# EAGLE board 00A-094-A (EAGLE 9.6.2)
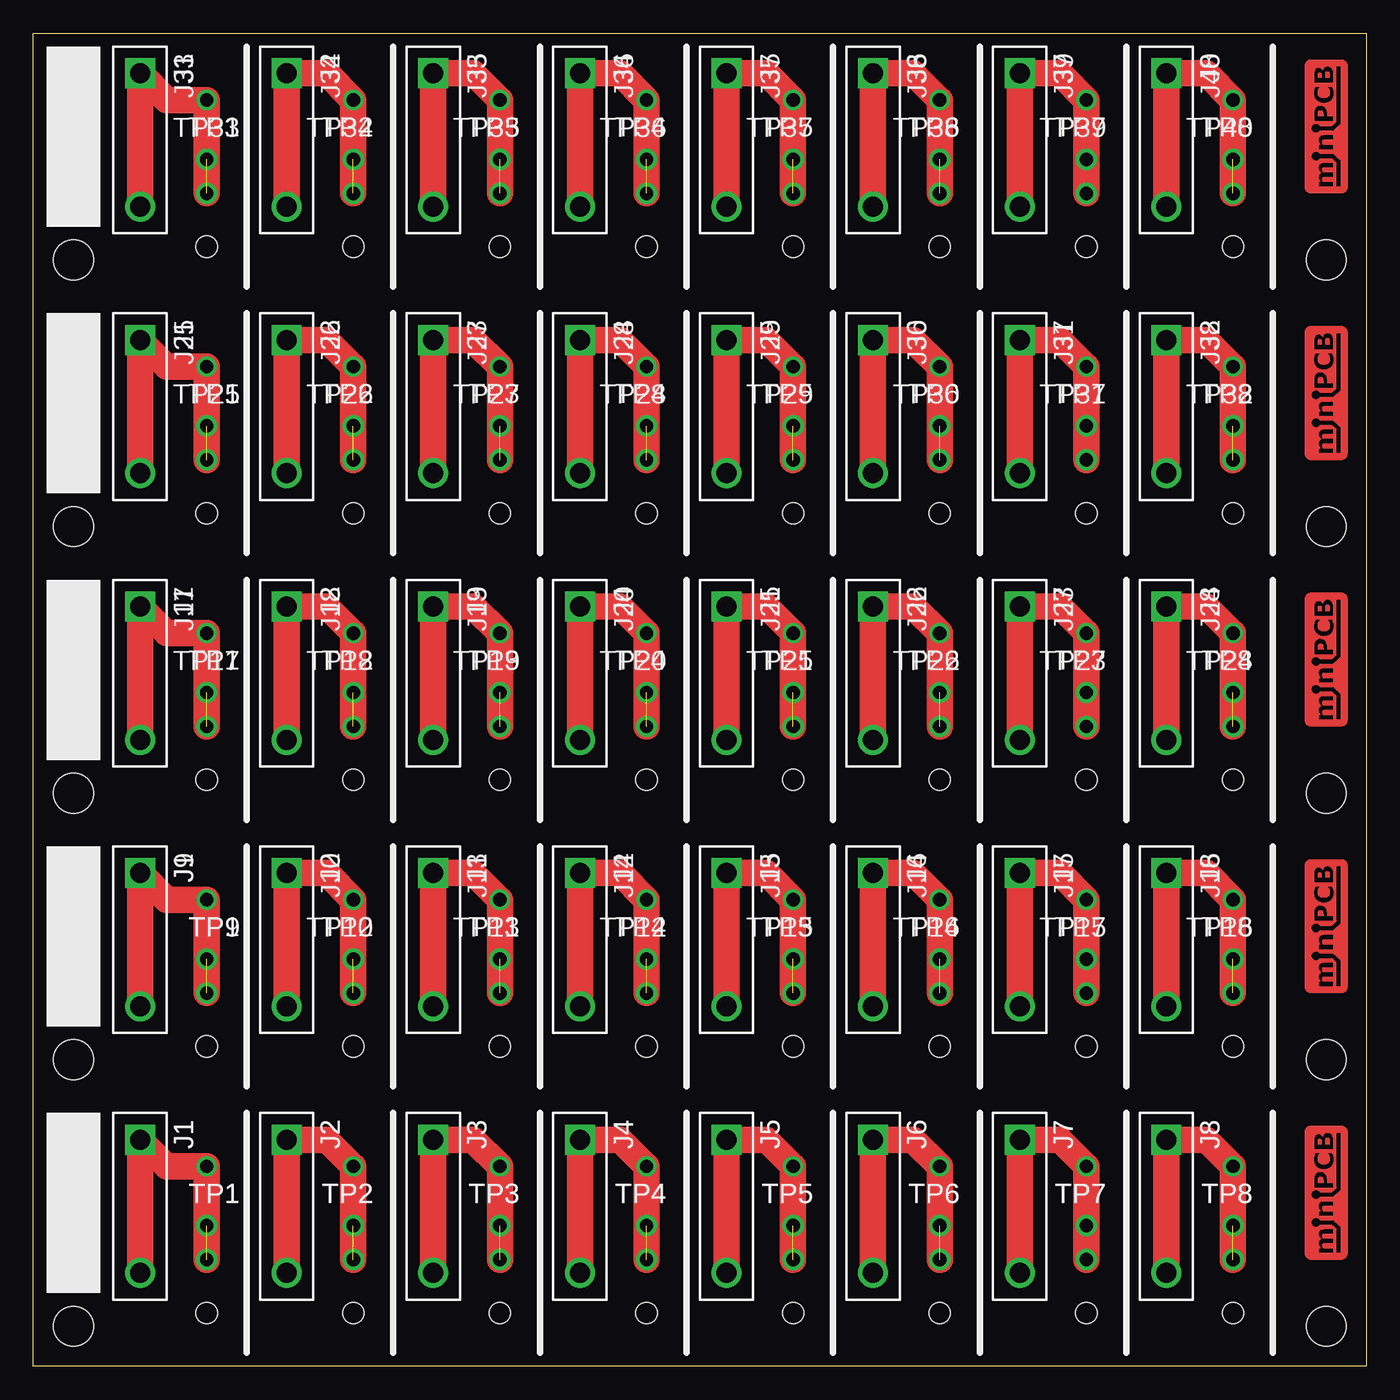
[diagram p0: board, top side]
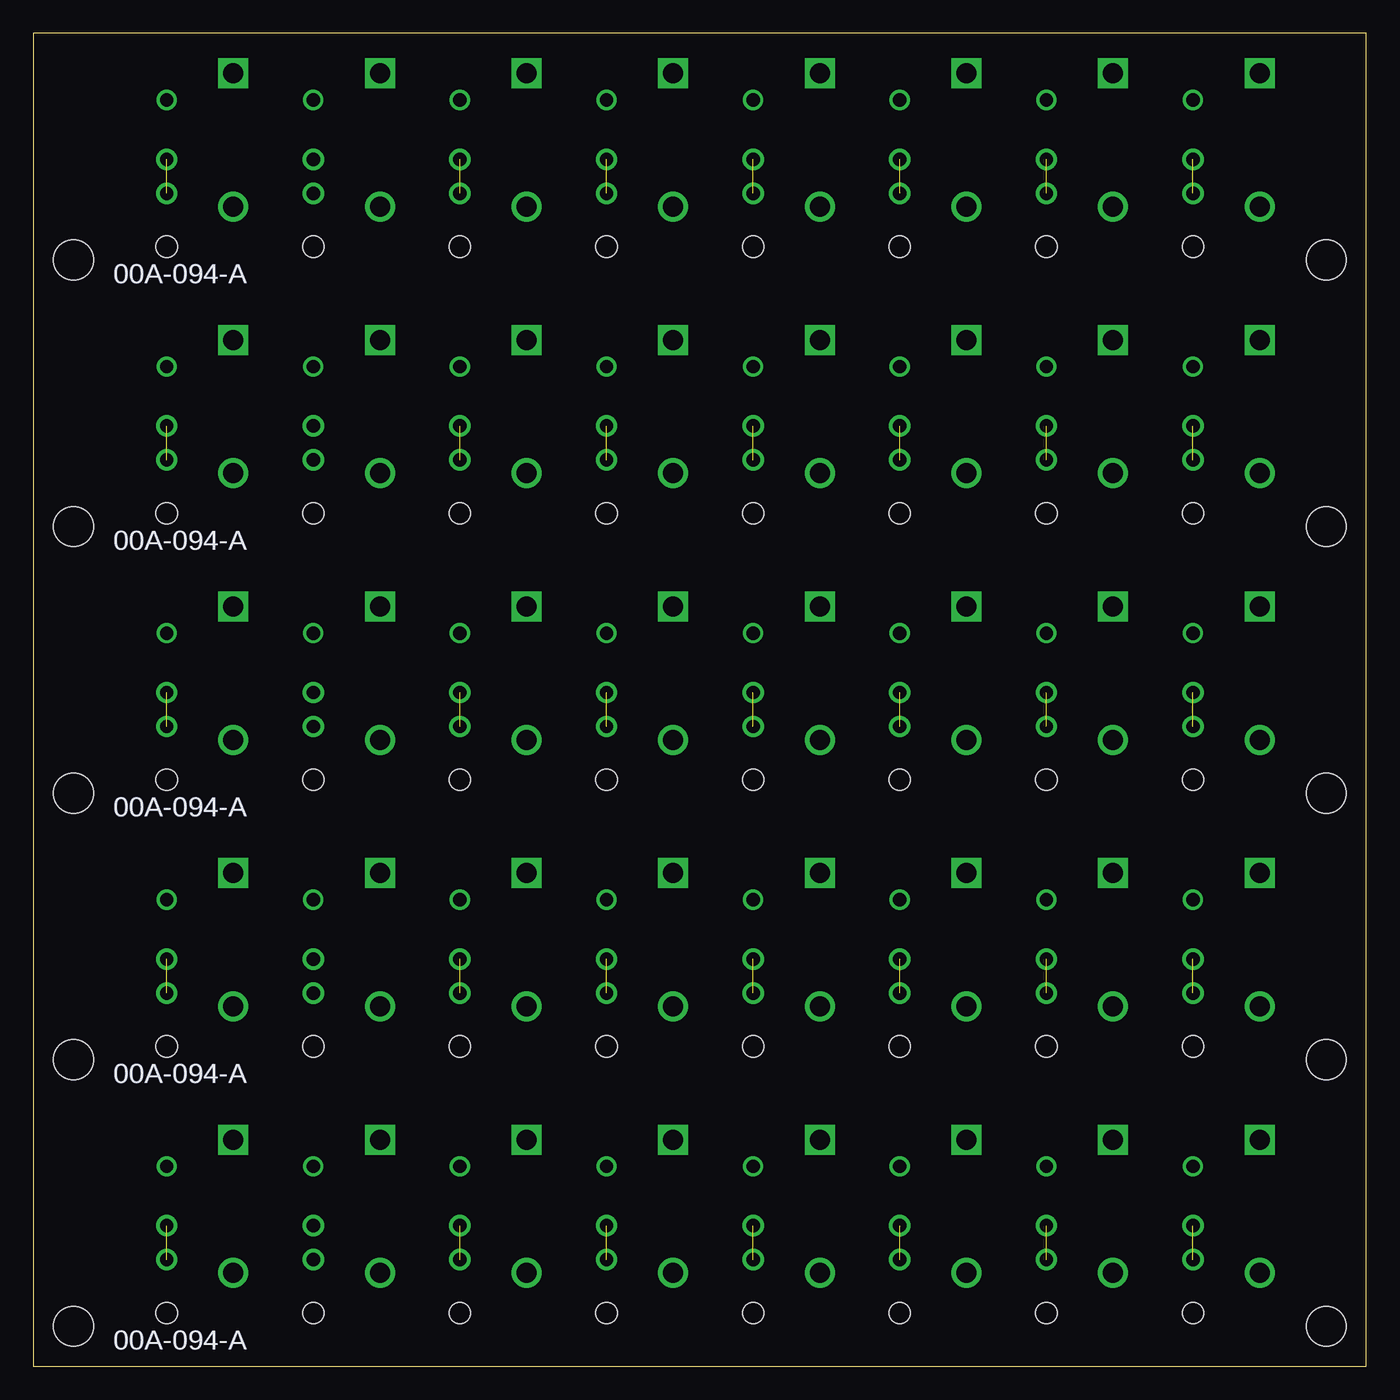
[diagram p1: board, bottom side, seen from below]

Size 100 x 100 mm. Coordinates in mm from the lower left corner, seen from the top.
Outline: 0,0 0,100 100,100 100,0 0,0
Copper layers (1*16): Top 0.035mm / dielectric 0.15mm / Bottom 0.035mm
Design rules "default": minimum track width 6mil, minimum drill 0.35mm, track to track 6mil, track to pad 6mil, pad to pad 6mil, via to via 6mil, smd to smd 6mil, copper to edge 40mil, drill to drill 6mil, minimum pad ring 10mil, minimum via ring 8mil, stop-mask expansion 4mil, vias tented up to drill 0mil, thermal gap 10mil

## Footprints (pad centres in the part's own frame; a part is rotated, then mirrored left to right if it is on the bottom)
PINS_1_KE6060 = drill 1.5 square: 1 -5,0 | drill 1.5: 2 5,0
PINS_1_1MM-NOTEXT = drill 1 pad 1.6: 1 4,0; 2 6.54,0 | hole 1.6: 0,0
MINIPCB_00A_20X100 = hole 3: 97,3; 3,3
PINS_1_TESTPOINT_KE5000_NOTEXT = drill 1: 1 0,0

## Placement (x,y rotation side)
E$1  [MINIPCB_PANEL_IMAGEFRAME]  -25,-35 0 top  (outside the outline)
J1  [PINS_1_KE6060]  8,12 270 top
J2  [PINS_1_KE6060]  19,12 270 top
J3  [PINS_1_KE6060]  30,12 270 top
J4  [PINS_1_KE6060]  41,12 270 top
J5  [PINS_1_KE6060]  52,12 270 top
J6  [PINS_1_KE6060]  63,12 270 top
J7  [PINS_1_KE6060]  74,12 270 top
J8  [PINS_1_KE6060]  85,12 270 top
J9  [PINS_1_KE6060]  8,32 270 top
J10  [PINS_1_KE6060]  19,32 270 top
J11  [PINS_1_KE6060]  30,32 270 top
J12  [PINS_1_KE6060]  41,32 270 top
J13  [PINS_1_KE6060]  52,32 270 top
J14  [PINS_1_KE6060]  63,32 270 top
J15  [PINS_1_KE6060]  74,32 270 top
J16  [PINS_1_KE6060]  85,32 270 top
J17  [PINS_1_KE6060]  8,52 270 top
J18  [PINS_1_KE6060]  19,52 270 top
J19  [PINS_1_KE6060]  30,52 270 top
J20  [PINS_1_KE6060]  41,52 270 top
J21  [PINS_1_KE6060]  52,52 270 top
J22  [PINS_1_KE6060]  63,52 270 top
J23  [PINS_1_KE6060]  74,52 270 top
J24  [PINS_1_KE6060]  85,52 270 top
J25  [PINS_1_KE6060]  8,72 270 top
J26  [PINS_1_KE6060]  19,72 270 top
J27  [PINS_1_KE6060]  30,72 270 top
J28  [PINS_1_KE6060]  41,72 270 top
J29  [PINS_1_KE6060]  52,72 270 top
J30  [PINS_1_KE6060]  63,72 270 top
J31  [PINS_1_KE6060]  74,72 270 top
J32  [PINS_1_KE6060]  85,72 270 top
J33  [PINS_1_KE6060]  8,92 270 top
J34  [PINS_1_KE6060]  19,92 270 top
J35  [PINS_1_KE6060]  30,92 270 top
J36  [PINS_1_KE6060]  41,92 270 top
J37  [PINS_1_KE6060]  52,92 270 top
J38  [PINS_1_KE6060]  63,92 270 top
J39  [PINS_1_KE6060]  74,92 270 top
J40  [PINS_1_KE6060]  85,92 270 top
P1  [PINS_1_1MM-NOTEXT]  13,4 90 top
P2  [PINS_1_1MM-NOTEXT]  24,4 90 top
P3  [PINS_1_1MM-NOTEXT]  35,4 90 top
P4  [PINS_1_1MM-NOTEXT]  46,4 90 top
P5  [PINS_1_1MM-NOTEXT]  57,4 90 top
P6  [PINS_1_1MM-NOTEXT]  68,4 90 top
P7  [PINS_1_1MM-NOTEXT]  79,4 90 top
P8  [PINS_1_1MM-NOTEXT]  90,4 90 top
P9  [PINS_1_1MM-NOTEXT]  13,24 90 top
P10  [PINS_1_1MM-NOTEXT]  24,24 90 top
P11  [PINS_1_1MM-NOTEXT]  35,24 90 top
P12  [PINS_1_1MM-NOTEXT]  46,24 90 top
P13  [PINS_1_1MM-NOTEXT]  57,24 90 top
P14  [PINS_1_1MM-NOTEXT]  68,24 90 top
P15  [PINS_1_1MM-NOTEXT]  79,24 90 top
P16  [PINS_1_1MM-NOTEXT]  90,24 90 top
P17  [PINS_1_1MM-NOTEXT]  13,44 90 top
P18  [PINS_1_1MM-NOTEXT]  24,44 90 top
P19  [PINS_1_1MM-NOTEXT]  35,44 90 top
P20  [PINS_1_1MM-NOTEXT]  46,44 90 top
P21  [PINS_1_1MM-NOTEXT]  57,44 90 top
P22  [PINS_1_1MM-NOTEXT]  68,44 90 top
P23  [PINS_1_1MM-NOTEXT]  79,44 90 top
P24  [PINS_1_1MM-NOTEXT]  90,44 90 top
P25  [PINS_1_1MM-NOTEXT]  13,64 90 top
P26  [PINS_1_1MM-NOTEXT]  24,64 90 top
P27  [PINS_1_1MM-NOTEXT]  35,64 90 top
P28  [PINS_1_1MM-NOTEXT]  46,64 90 top
P29  [PINS_1_1MM-NOTEXT]  57,64 90 top
P30  [PINS_1_1MM-NOTEXT]  68,64 90 top
P31  [PINS_1_1MM-NOTEXT]  79,64 90 top
P32  [PINS_1_1MM-NOTEXT]  90,64 90 top
P33  [PINS_1_1MM-NOTEXT]  13,84 90 top
P34  [PINS_1_1MM-NOTEXT]  24,84 90 top
P35  [PINS_1_1MM-NOTEXT]  35,84 90 top
P36  [PINS_1_1MM-NOTEXT]  46,84 90 top
P37  [PINS_1_1MM-NOTEXT]  57,84 90 top
P38  [PINS_1_1MM-NOTEXT]  68,84 90 top
P39  [PINS_1_1MM-NOTEXT]  79,84 90 top
P40  [PINS_1_1MM-NOTEXT]  90,84 90 top
PCB1  [MINIPCB_00A_20X100]  0,0 0 top
PCB2  [MINIPCB_00A_20X100]  0,20 0 top
PCB3  [MINIPCB_00A_20X100]  0,40 0 top
PCB4  [MINIPCB_00A_20X100]  0,60 0 top
PCB5  [MINIPCB_00A_20X100]  0,80 0 top
TP1  [PINS_1_TESTPOINT_KE5000_NOTEXT]  13,15 180 top
TP2  [PINS_1_TESTPOINT_KE5000_NOTEXT]  24,15 180 top
TP3  [PINS_1_TESTPOINT_KE5000_NOTEXT]  35,15 180 top
TP4  [PINS_1_TESTPOINT_KE5000_NOTEXT]  46,15 180 top
TP5  [PINS_1_TESTPOINT_KE5000_NOTEXT]  57,15 180 top
TP6  [PINS_1_TESTPOINT_KE5000_NOTEXT]  68,15 180 top
TP7  [PINS_1_TESTPOINT_KE5000_NOTEXT]  79,15 180 top
TP8  [PINS_1_TESTPOINT_KE5000_NOTEXT]  90,15 180 top
TP9  [PINS_1_TESTPOINT_KE5000_NOTEXT]  13,35 180 top
TP10  [PINS_1_TESTPOINT_KE5000_NOTEXT]  24,35 180 top
TP11  [PINS_1_TESTPOINT_KE5000_NOTEXT]  35,35 180 top
TP12  [PINS_1_TESTPOINT_KE5000_NOTEXT]  46,35 180 top
TP13  [PINS_1_TESTPOINT_KE5000_NOTEXT]  57,35 180 top
TP14  [PINS_1_TESTPOINT_KE5000_NOTEXT]  68,35 180 top
TP15  [PINS_1_TESTPOINT_KE5000_NOTEXT]  79,35 180 top
TP16  [PINS_1_TESTPOINT_KE5000_NOTEXT]  90,35 180 top
TP17  [PINS_1_TESTPOINT_KE5000_NOTEXT]  13,55 180 top
TP18  [PINS_1_TESTPOINT_KE5000_NOTEXT]  24,55 180 top
TP19  [PINS_1_TESTPOINT_KE5000_NOTEXT]  35,55 180 top
TP20  [PINS_1_TESTPOINT_KE5000_NOTEXT]  46,55 180 top
TP21  [PINS_1_TESTPOINT_KE5000_NOTEXT]  57,55 180 top
TP22  [PINS_1_TESTPOINT_KE5000_NOTEXT]  68,55 180 top
TP23  [PINS_1_TESTPOINT_KE5000_NOTEXT]  79,55 180 top
TP24  [PINS_1_TESTPOINT_KE5000_NOTEXT]  90,55 180 top
TP25  [PINS_1_TESTPOINT_KE5000_NOTEXT]  13,75 180 top
TP26  [PINS_1_TESTPOINT_KE5000_NOTEXT]  24,75 180 top
TP27  [PINS_1_TESTPOINT_KE5000_NOTEXT]  35,75 180 top
TP28  [PINS_1_TESTPOINT_KE5000_NOTEXT]  46,75 180 top
TP29  [PINS_1_TESTPOINT_KE5000_NOTEXT]  57,75 180 top
TP30  [PINS_1_TESTPOINT_KE5000_NOTEXT]  68,75 180 top
TP31  [PINS_1_TESTPOINT_KE5000_NOTEXT]  79,75 180 top
TP32  [PINS_1_TESTPOINT_KE5000_NOTEXT]  90,75 180 top
TP33  [PINS_1_TESTPOINT_KE5000_NOTEXT]  13,95 180 top
TP34  [PINS_1_TESTPOINT_KE5000_NOTEXT]  24,95 180 top
TP35  [PINS_1_TESTPOINT_KE5000_NOTEXT]  35,95 180 top
TP36  [PINS_1_TESTPOINT_KE5000_NOTEXT]  46,95 180 top
TP37  [PINS_1_TESTPOINT_KE5000_NOTEXT]  57,95 180 top
TP38  [PINS_1_TESTPOINT_KE5000_NOTEXT]  68,95 180 top
TP39  [PINS_1_TESTPOINT_KE5000_NOTEXT]  79,95 180 top
TP40  [PINS_1_TESTPOINT_KE5000_NOTEXT]  90,95 180 top

## Library data of the parts
E$1 J1-J40 P1-P40 TP1-TP40 = minipcb
PCB1-PCB5 = minipcb; PART_NUMBER: 00A-094-A

## Nets
N$1: J1.1 J1.2 P1.1 P1.2 TP1.1
N$2: J8.1 J8.2 P8.1 P8.2 TP8.1
N$3: J2.1 J2.2 P2.1 P2.2 TP2.1
N$4: J9.1 J9.2 P9.1 P9.2 TP9.1
N$5: J3.1 J3.2 P3.1 P3.2 TP3.1
N$6: J10.1 J10.2 P10.1 P10.2 TP10.1
N$7: J4.1 J4.2 P4.1 P4.2 TP4.1
N$8: J11.1 J11.2 P11.1 P11.2 TP11.1
N$9: J5.1 J5.2 P5.1 P5.2 TP5.1
N$10: J12.1 J12.2 P12.1 P12.2 TP12.1
N$11: J6.1 J6.2 P6.1 P6.2 TP6.1
N$12: J13.1 J13.2 P13.1 P13.2 TP13.1
N$13: J14.1 J14.2 P14.1 P14.2 TP14.1
N$14: J7.1 J7.2 P7.1 P7.2 TP7.1
N$15: J15.1 J15.2 P15.1 P15.2 TP15.1
N$16: J16.1 J16.2 P16.1 P16.2 TP16.1
N$17: J17.1 J17.2 P17.1 P17.2 TP17.1
N$18: J18.1 J18.2 P18.1 P18.2 TP18.1
N$19: J19.1 J19.2 P19.1 P19.2 TP19.1
N$20: J20.1 J20.2 P20.1 P20.2 TP20.1
N$21: J21.1 J21.2 P21.1 P21.2 TP21.1
N$22: J22.1 J22.2 P22.1 P22.2 TP22.1
N$23: J23.1 J23.2 P23.1 P23.2 TP23.1
N$24: J24.1 J24.2 P24.1 P24.2 TP24.1
N$25: J25.1 J25.2 P25.1 P25.2 TP25.1
N$26: J26.1 J26.2 P26.1 P26.2 TP26.1
N$27: J27.1 J27.2 P27.1 P27.2 TP27.1
N$28: J28.1 J28.2 P28.1 P28.2 TP28.1
N$29: J29.1 J29.2 P29.1 P29.2 TP29.1
N$30: J30.1 J30.2 P30.1 P30.2 TP30.1
N$31: J31.1 J31.2 P31.1 P31.2 TP31.1
N$32: J32.1 J32.2 P32.1 P32.2 TP32.1
N$33: J33.1 J33.2 P33.1 P33.2 TP33.1
N$34: J34.1 J34.2 P34.1 P34.2 TP34.1
N$35: J35.1 J35.2 P35.1 P35.2 TP35.1
N$36: J36.1 J36.2 P36.1 P36.2 TP36.1
N$37: J37.1 J37.2 P37.1 P37.2 TP37.1
N$38: J38.1 J38.2 P38.1 P38.2 TP38.1
N$39: J39.1 J39.2 P39.1 P39.2 TP39.1
N$40: J40.1 J40.2 P40.1 P40.2 TP40.1

## Tracks (layer width: path | path; a pad name or v marks a point on that pad's centre or on a via)
N$1  (1 unrouted)
  Top 2: J1.2 J1.1 10,15 TP1.1 P1.1
N$2  (1 unrouted)
  Top 2: J8.2 J8.1 88,17 TP8.1 P8.1
N$3  (1 unrouted)
  Top 2: J2.2 J2.1 22,17 TP2.1 P2.1
N$4  (1 unrouted)
  Top 2: J9.2 J9.1 10,35 TP9.1 P9.1
N$5  (1 unrouted)
  Top 2: J3.2 J3.1 33,17 TP3.1 P3.1
N$6  (1 unrouted)
  Top 2: J10.2 J10.1 22,37 TP10.1 P10.1
N$7  (1 unrouted)
  Top 2: J4.2 J4.1 44,17 TP4.1 P4.1
N$8  (1 unrouted)
  Top 2: J11.2 J11.1 33,37 TP11.1 P11.1
N$9  (1 unrouted)
  Top 2: J5.2 J5.1 55,17 TP5.1 P5.1
N$10  (1 unrouted)
  Top 2: J12.2 J12.1 44,37 TP12.1 P12.1
N$11  (1 unrouted)
  Top 2: J6.2 J6.1 66,17 TP6.1 P6.1
N$12  (1 unrouted)
  Top 2: J13.2 J13.1 55,37 TP13.1 P13.1
N$13  (1 unrouted)
  Top 2: J14.2 J14.1 66,37 TP14.1 P14.1
N$14
  Top 2: J7.2 J7.1 77,17 TP7.1 P7.2 P7.1
N$15
  Top 2: J15.2 J15.1 77,37 TP15.1 P15.2 P15.1
N$16  (1 unrouted)
  Top 2: J16.2 J16.1 88,37 TP16.1 P16.1
N$17  (1 unrouted)
  Top 2: J17.2 J17.1 10,55 TP17.1 P17.1
N$18  (1 unrouted)
  Top 2: J18.2 J18.1 22,57 TP18.1 P18.1
N$19  (1 unrouted)
  Top 2: J19.2 J19.1 33,57 TP19.1 P19.1
N$20  (1 unrouted)
  Top 2: J20.2 J20.1 44,57 TP20.1 P20.1
N$21  (1 unrouted)
  Top 2: J21.2 J21.1 55,57 TP21.1 P21.1
N$22  (1 unrouted)
  Top 2: J22.2 J22.1 66,57 TP22.1 P22.1
N$23
  Top 2: J23.2 J23.1 77,57 TP23.1 P23.2 P23.1
N$24  (1 unrouted)
  Top 2: J24.2 J24.1 88,57 TP24.1 P24.1
N$25  (1 unrouted)
  Top 2: J25.2 J25.1 10,75 TP25.1 P25.1
N$26  (1 unrouted)
  Top 2: J26.2 J26.1 22,77 TP26.1 P26.1
N$27  (1 unrouted)
  Top 2: J27.2 J27.1 33,77 TP27.1 P27.1
N$28  (1 unrouted)
  Top 2: J28.2 J28.1 44,77 TP28.1 P28.1
N$29  (1 unrouted)
  Top 2: J29.2 J29.1 55,77 TP29.1 P29.1
N$30  (1 unrouted)
  Top 2: J30.2 J30.1 66,77 TP30.1 P30.1
N$31
  Top 2: J31.2 J31.1 77,77 TP31.1 P31.2 P31.1
N$32  (1 unrouted)
  Top 2: J32.2 J32.1 88,77 TP32.1 P32.1
N$33  (1 unrouted)
  Top 2: J33.2 J33.1 10,95 TP33.1 P33.1
N$34  (1 unrouted)
  Top 2: J34.2 J34.1 22,97 TP34.1 P34.1
N$35  (1 unrouted)
  Top 2: J35.2 J35.1 33,97 TP35.1 P35.1
N$36  (1 unrouted)
  Top 2: J36.2 J36.1 44,97 TP36.1 P36.1
N$37  (1 unrouted)
  Top 2: J37.2 J37.1 55,97 TP37.1 P37.1
N$38  (1 unrouted)
  Top 2: J38.2 J38.1 66,97 TP38.1 P38.1
N$39
  Top 2: J39.2 J39.1 77,97 TP39.1 P39.2 P39.1
N$40  (1 unrouted)
  Top 2: J40.2 J40.1 88,97 TP40.1 P40.1

## Text on the board
_tNames: J1 | J2 | J3 | J4 | J5 | J6 | J7 | J8 | TP1 | TP2 | TP3 | TP4 | TP5 | TP6 | TP7 | TP8 | J1 | J2 | J3 | J4 | J5 | J6 | J7 | J8 | TP1 | TP2 | TP3 | TP4 | TP5 | TP6 | TP7 | TP8 | J1 | J2 | J3 | J4 | J5 | J6 | J7 | J8 | TP1 | TP2 | TP3 | TP4 | TP5 | TP6 | TP7 | TP8 | J1 | J2 | J3 | J4 | J5 | J6 | J7 | J8 | TP1 | TP2 | TP3 | TP4 | TP5 | TP6 | TP7 | TP8 | J1 | J2 | J3 | J4 | J5 | J6 | J7 | J8 | TP1 | TP2 | TP3 | TP4 | TP5 | TP6 | TP7 | TP8